# Altium PCB SV601121A.PcbDoc (part 2 of 2)
Units mil, origin at the board's own origin, x right, y up, seen from the top; angles counter-clockwise.
Board outline 1980 x 1700 mil, 6 copper layers (Top Layer, MidLayer1, MidLayer2, Mid-Layer 3, Mid-Layer 4, Bottom Layer), stack 61.3 mil thick; 85 components, 35 nets, 187 pads, 175 vias.
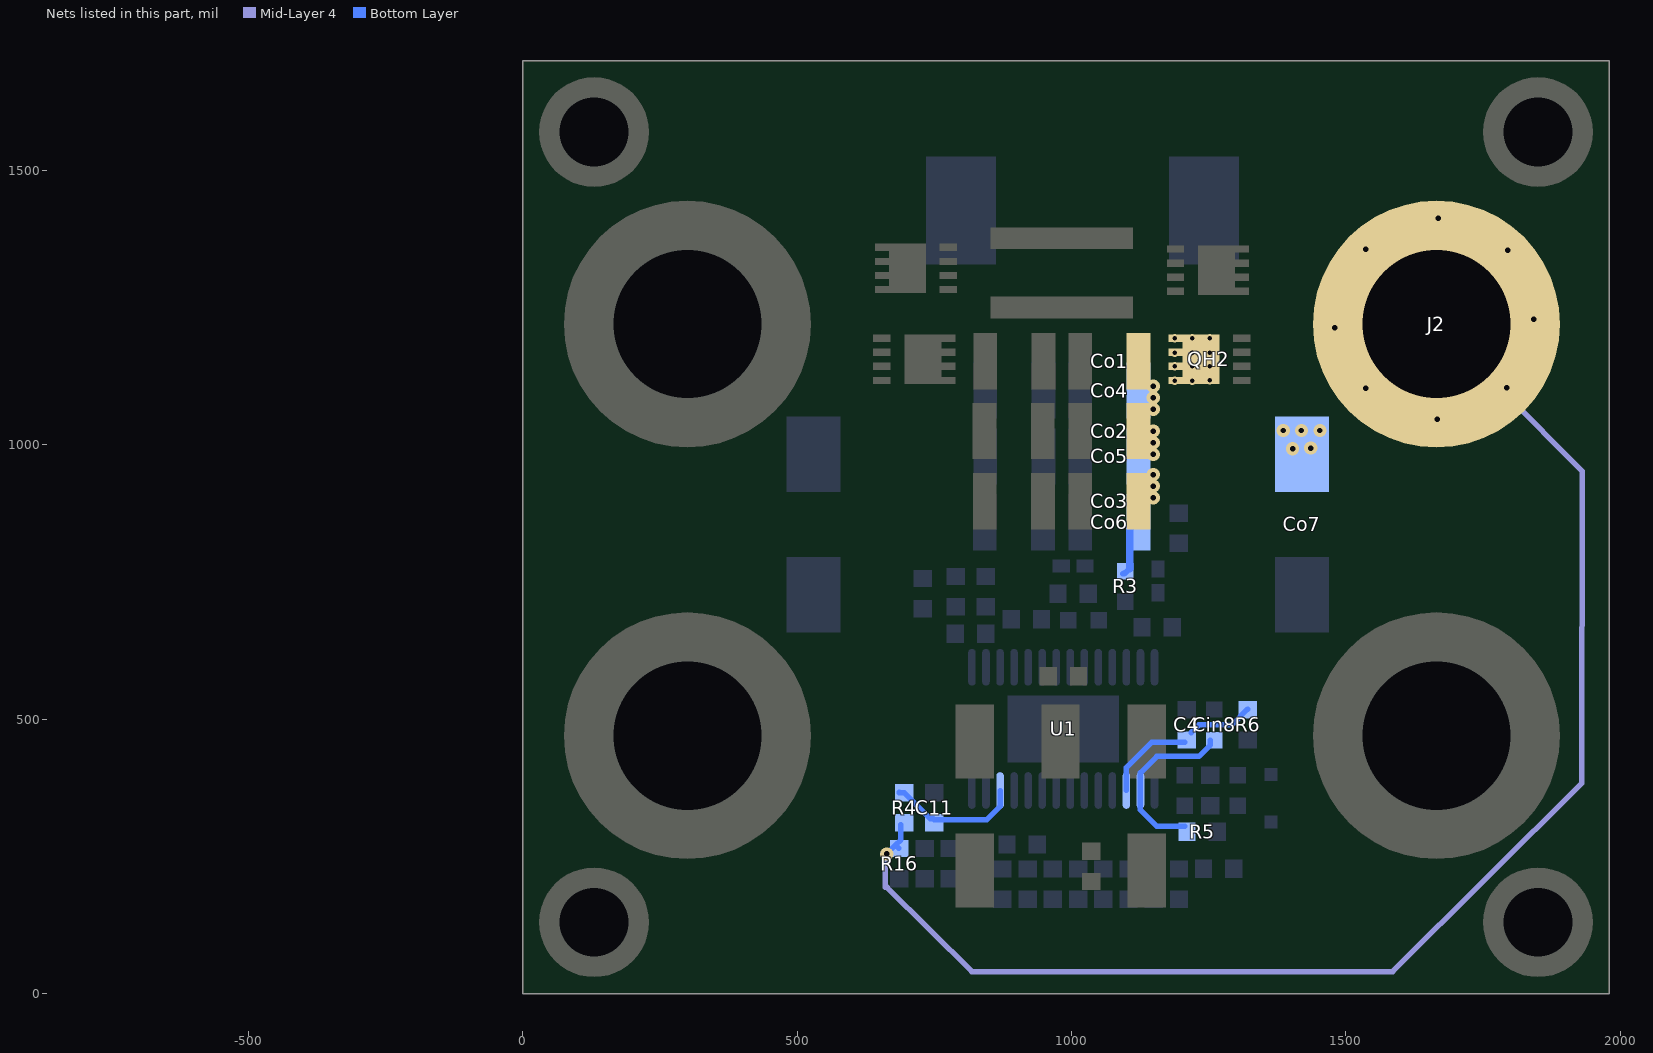
[diagram p6: the nets of this part, all layers, seen from the top]

## Via types
v1: diameter 24, hole 10, Top Layer to Bottom Layer, tented both sides, 77 vias
v2: diameter 15.75, hole 7.87, Top Layer to Bottom Layer, tented both sides, 54 vias
v3: diameter 30, hole 15, Top Layer to Bottom Layer, tented both sides, 17 vias
v4: diameter 15.75, hole 7.87, Top Layer to Bottom Layer, 15 vias
v5: diameter 24, hole 12, Top Layer to Bottom Layer, tented both sides, 8 vias
v6: diameter 20, hole 10, Top Layer to Bottom Layer, tented both sides, 2 vias
v7: diameter 29, hole 15, Top Layer to Bottom Layer, tented both sides, 2 vias

## Nets (pads, with @x,y where several pads share a name; then routed paths per layer and width w, separated by ;. In a path a pad name is that pad's centre, name@x,y a point inside that pad or via, vN(x,y) a via of type N, cw(c..) or ccw(c..) an arc to the next point about the centre after c; other vN are vias at no path point) (continued)
VIN_IC: Cin8.1 R5.1 U1.2 | length 317.9
  Bottom Layer w10: R5.1@1206.6,304.75 1155.71,304.75 1125.7,334.76 U1.2@1125.7,370.16 1125.7,402.46 1155.53,432.28 1232.04,432.28 1253.16,453.4 Cin8.1@1253.16,461.75
VISNS: C4.2 R6.2 U1.3 | length 287.3
  Bottom Layer w10: U1.3@1100.11,370.16 1100.11,411.7 1146.6,458.19 C4.2@1206.16,458.19 ; C4.2@1218.16,475.75 1232.16,489.75 1292.44,489.75 R6.2@1321,518.31
VOUT: Co1.1 Co2.1 Co3.1 Co4.1 Co5.1 Co6.1 Co7.1 J2.1 QH2.5 QH2.6 QH2.7 QH2.8 QH2.9 R3.2 R4.2 R16.1 | length 2557.5
  Mid-Layer 4 w10: 661,193.74 v1@661,254.75 ; 664.08,193.74 818.45,40 1585.31,40 1930,383.69 ; J2.1@1793.16,1100.97 v1(1793.16,1104) 1793.16,1124.19 1791.46,1125.9 1791.46,1100.5 1786.85,1095.9 1930.89,951.86 1930,386.43
  Bottom Layer w10: v1@657.22,254.75 v1(663.4,254.75) R16.1@679.4,270.75 ; R16.1@685.4,264.75 R16.1@679.4,270.75 ; R4.2@688.96,307.75 688.96,280.31 R16.1@679.4,270.75 ; R3.2@1092.96,764.75 1095.59,766.3 1099,768.3 R3.2@1100.24,769.03 ; R3.2@1096.51,764.75 R3.2@1106,774.24 ; Co6.1@1106,849.64 Co6.1@1122.11,865.75
  Bottom Layer w14: R3.2@1106,774.24 Co6.1@1106,849.64
  other v1: 1149,903.75 1149,924.75 1149,945.75 1149,982.62 1403,993 1436,994 1149,1003.88 1149,1025.14 1386,1026.16 1419,1026.16 1452.68,1026.16 1666.16,1046.9 1149,1064.75 1149,1085.75 1536,1103 1149,1106.75 1480,1213.74 1842.16,1228.9 1795,1355 1536,1356 1668.16,1412.9
  other v2: 1188.16,1117 1220,1117 1252,1118 1188,1143 1220,1143 1252,1143 1188,1168 1220,1168 1252,1168 1188,1194 1220,1194 1252,1194
VOUTSNS: C11.1 R4.1 U1.12 | length 243.6
  Bottom Layer w10: R4.1@686,366.6 686.15,366.45 694.85,366.45 R4.1@695,366.31 742.31,319 748,319 750.25,316.75 845.47,316.75 852.42,323.7 ; 852.45,323.7 864.1,335.35 ; 864.1,335.38 869.8,341.08 U1.12@869.8,370.16
pads on no net: H3. H4. H7. H8. LBL1.0

## Polygon pours and split planes (outlines as drawn)
SW2 on Bottom Layer "Bottom Layer-No Net 1" (solid, remove dead copper, pour order 133): 1294.99,1109 1369.55,1109 1376.94,1116.64 1377,1320.26 1351,1346 1326,1371 1325.83,1519.99 1324.28,1523.73 1298.01,1549.98 1078.03,1550.03 1048.93,1520.94 1048.93,1243.96 1066.66,1226 1280.96,1226.05 1288.25,1218.74 1288.02,1115.99
SW1 on Bottom Layer "Bottom Layer-No Net" (solid, remove dead copper, pour order 132): 631.4,1139.6 636.21,1134.79 679.79,1134.79 684.06,1139.06 684.06,1215.22 694.84,1226 940.04,1226 957,1242.96 957,1523 930,1550 741,1550 714,1523 714,1381 713.29,1380.71 650.1,1380.97 632.69,1363.66
VOUT on Bottom Layer "Bot Layer-VOUT" (solid, remove dead copper, pour order 134): 1098,1221.29 1238.86,1221.29 1267.63,1191.99 1267.63,1105.09 1340.03,1105.09 1340.98,1690.13 1964,1688.1 1964,850.76 1271.27,853.21 1222.99,853.4 1222.88,895.92 1164.46,895.92 1152.56,882.78 1152.56,807 1098,807 1098.16,854.42
VIN on Bottom Layer "Bot Layer-VIN" (solid, remove dead copper, pour order 135): 869.8,1211.23 707.81,1211.79 707.81,1688.01 13.64,1687.97 11.93,855.39 730.43,855.39 868.97,855.27
GND on Bottom Layer "Bot Layer-GND2" (solid, remove dead copper, pour order 136): 7.2,1213.2 1961.89,1212.97 1969,1295.34 1969,10 9,10
SW2 on Bottom Layer "Bottom Layer-SW2" (solid, pour order 131): 1325.65,1268 1325.65,1526 1179,1526 1179.37,1268
SW1 on Top Layer "Top Layer-SW1" (solid, remove dead copper, pour order 103): 621.89,1135.21 622.14,1371.07 738.27,1371.07 735.85,1368.64 735.85,1267.68 674.07,1205.9 672.78,1205.01 672.78,1135.75
GND on Top Layer "Top Layer-GND" (solid, remove dead copper, pour order 106): 884.02,1266 1077,1266 1076.7,765.16 908.64,765.16 883.63,769.22
SW2 on Top Layer "Top Layer-SW2" (solid, remove dead copper, pour order 104): 1228.28,1398 1337.35,1398 1374.71,1360.46 1374.52,1111 1293,1111 1293,1244 1228,1244
VOUT on Top Layer "Top Layer-VOUT" (solid, remove dead copper, pour order 107): 1098.99,1218.65 1279,1219 1279,1100 1384.49,1099.65 1383.03,1409.78 997.88,1409.78 997.85,1689 1965.66,1688.74 1971.03,843.97 1099,844.03
GND on Top Layer "Top Layer-GND2" (solid, remove dead copper, pour order 109): 10,830 1970,830 1970,10 10,10
NetQl1_1 on Top Layer "Top Layer-Q1-1" (solid, pour order 105): 759.96,1342.61 800,1343 800,1398 1205.83,1398 1205.39,1276.51 759.96,1276.51
VIN on Top Layer "Top Layer-VIN" (solid, remove dead copper, pour order 108): 865.14,1216.99 683,1217.01 683,1108 627,1108 627,1265 972,1265 972,1689 14,1689.97 14,844.78 865,844.03
VOUT on MidLayer2 "MidLayer1-No Net 1" (solid, remove dead copper, pour order 116): 1178,1205.38 1264,1205.38 1263.97,1205.35 1263.97,1104.38 1178,1104.38
VIN on MidLayer2 "MidLayer1-No Net 1" (solid, remove dead copper, pour order 115): 700,1206 786,1206 785.97,1205.97 785.97,1105 700,1105
SW1 on MidLayer2 "MidLayer1-No Net 1" (solid, remove dead copper, pour order 117): 643,1371 729,1371 728.97,1370.97 728.97,1270 643,1270
SW2 on MidLayer2 "MidLayer1-No Net 1" (solid, remove dead copper, pour order 118): 1236,1368.58 1322,1368.58 1321.97,1368.55 1321.97,1267.58 1236,1267.58
GND on MidLayer2 "MidLayer2-GND" (solid, pour order 119): 14.55,1690.59 15.54,1689.62 1960.63,1689.62 1963.55,1686.76 1965,9 1912.53,11.14 -14,11.14 12.48,37.08 12.48,1687.64
VOUT on MidLayer2 "MidLayer2-VOUT" (solid, remove dead copper, shelved, pour order 120): 4056.05,-23494.45 2827.92,-23494.45 2827.92,-20744.45 4056.05,-20744.45
SW2 on MidLayer1 "MidLayer1-No Net 1" (solid, remove dead copper, pour order 111): 1236,1369 1322,1369 1321.97,1368.97 1321.97,1268 1236,1268
SW1 on MidLayer1 "MidLayer1-No Net" (solid, remove dead copper, pour order 110): 644,1372 728,1372 728,1270 644,1270
GND on MidLayer1 "Mid Layer1-GND2" (solid, remove dead copper, pour order 114): 14.16,1665.13 1963.85,1673.87 1962.85,10.79 15.16,5.78
VIN on MidLayer1 "MId-Layer-1-VIN" (solid, remove dead copper, pour order 112): 829,1689 13.3,1689 12.87,864 828,864
VOUT on MidLayer1 "Mid-Layer1-VOUT" (solid, remove dead copper, pour order 113): 1131.25,859.29 1131.25,1671.01 1961,1672.99 1962,859
VOUT on Mid-Layer 4 "MidLayer1-No Net 1" (solid, remove dead copper, pour order 127): 1175.32,1206 1261.32,1206 1261.29,1205.97 1261.29,1105 1175.32,1105
SW2 on Mid-Layer 4 "MidLayer1-No Net 1" (solid, remove dead copper, pour order 128): 1236,1369 1322,1369 1321.97,1368.97 1321.97,1268 1236,1268
SW1 on Mid-Layer 4 "MidLayer1-No Net 1" (solid, remove dead copper, pour order 129): 642,1372 728,1372 727.97,1371.97 727.97,1271 642,1271
VIN on Mid-Layer 4 "MidLayer1-No Net 1" (solid, remove dead copper, pour order 126): 700,1205 786,1205 785.97,1204.97 785.97,1104 700,1104
GND on Mid-Layer 4 "Mid-Layer 4-GND" (solid, pour order 130): 17.57,1688.52 21.22,1692 1974,1692 1967.53,1685.83 1967.53,8.08 1963.24,4 17.57,4
VIN on Mid-Layer 3 "MidLayer1-No Net 1" (solid, remove dead copper, pour order 123): 701,1205 787,1205 786.97,1204.97 786.97,1104 701,1104
VOUT on Mid-Layer 3 "MidLayer1-No Net 1" (solid, remove dead copper, pour order 122): 1177,1206 1263,1206 1262.97,1205.97 1262.97,1105 1177,1105
SW2 on Mid-Layer 3 "MidLayer1-No Net 1" (solid, remove dead copper, pour order 121): 1235,1370 1321,1370 1320.97,1369.97 1320.97,1269 1235,1269
SW1 on Mid-Layer 3 "MidLayer1-No Net 1" (solid, remove dead copper, pour order 124): 643,1371 729,1371 728.97,1370.97 728.97,1270 643,1270
GND on Mid-Layer 3 "Mid-Layer 3-GND" (solid, pour order 125): 24.19,1667.41 27.51,1670.55 1963.27,1670.55 1969.19,1664.97 1969.19,10.09 1968.77,9.7 24.19,9.7

## Keep-outs
Keep-Out Layer:
  lines w10: -5,-5 1985,-5 1985,1705 -5,1705 -5,-5

## Other copper
Top Layer:
  pour cut-out: 985.61,1312.97 cw(c985.61,1331.32) 967.26,1331.32 cw(c985.61,1331.32) 985.61,1349.68 cw(c985.61,1331.32) 1003.97,1331.32 cw(c985.61,1331.32)
  pour cut-out: 985.61,1276.16 cw(c985.61,1294.51) 967.26,1294.51 cw(c985.61,1294.51) 985.61,1312.86 cw(c985.61,1294.51) 1003.97,1294.51 cw(c985.61,1294.51)
  pour cut-out: 919.86,711.86 918,702.49 912.69,694.55 904.75,689.25 895.39,687.39 886.03,689.25 878.09,694.55 872.78,702.49 870.92,711.86 872.78,721.22 878.09,729.16 886.03,734.47 895.39,736.33 904.75,734.47 912.69,729.16 918,721.22
  pour cut-out: 825.44,782.37 823.58,773 818.27,765.06 810.33,759.76 800.97,757.9 791.6,759.76 783.67,765.06 778.36,773 776.5,782.37 778.36,791.73 783.67,799.67 791.6,804.98 800.97,806.84 810.33,804.98 818.27,799.67 823.58,791.73
  text ".Layer_Name" at 129,-1122.49 h60
MidLayer1:
  pour cut-out: 985.48,1277.59 cw(c985.48,1295.94) 967.13,1295.94 cw(c985.48,1295.94) 985.48,1314.3 cw(c985.48,1295.94) 1003.84,1295.94 cw(c985.48,1295.94)
  pour cut-out: 826.32,781.54 824.45,772.17 819.15,764.24 811.21,758.93 801.85,757.07 792.48,758.93 784.54,764.24 779.24,772.17 777.38,781.54 779.24,790.9 784.54,798.84 792.48,804.15 801.85,806.01 811.21,804.15 819.15,798.84 824.45,790.9
  text ".layer_Name" at 129,-1124 h60
MidLayer2:
  pour cut-out: 985.61,1276.16 cw(c985.61,1294.51) 967.26,1294.51 cw(c985.61,1294.51) 985.61,1312.86 cw(c985.61,1294.51) 1003.97,1294.51 cw(c985.61,1294.51)
  pour cut-out: 825.44,782.37 823.58,773 818.27,765.06 810.33,759.76 800.97,757.9 791.6,759.76 783.67,765.06 778.36,773 776.5,782.37 778.36,791.73 783.67,799.67 791.6,804.98 800.97,806.84 810.33,804.98 818.27,799.67 823.58,791.73
  text ".layer_Name" at 129,-1122 h60
Mid-Layer 3:
  pour cut-out: 985.61,1276.16 cw(c985.61,1294.51) 967.26,1294.51 cw(c985.61,1294.51) 985.61,1312.86 cw(c985.61,1294.51) 1003.97,1294.51 cw(c985.61,1294.51)
  pour cut-out: 825.44,782.37 823.58,773 818.27,765.06 810.33,759.76 800.97,757.9 791.6,759.76 783.67,765.06 778.36,773 776.5,782.37 778.36,791.73 783.67,799.67 791.6,804.98 800.97,806.84 810.33,804.98 818.27,799.67 823.58,791.73
  text ".layer_Name" at 127,-1124 h60
Mid-Layer 4:
  pour cut-out: 985.61,1276.16 cw(c985.61,1294.51) 967.26,1294.51 cw(c985.61,1294.51) 985.61,1312.86 cw(c985.61,1294.51) 1003.97,1294.51 cw(c985.61,1294.51)
  pour cut-out: -788.42,451.51 cw(c-788.42,469.86) -806.77,469.86 cw(c-788.42,469.86) -788.42,488.22 cw(c-788.42,469.86) -770.07,469.86 cw(c-788.42,469.86)
  pour cut-out: 825.14,781.61 823.27,772.24 817.97,764.3 810.03,759 800.67,757.14 791.3,759 783.36,764.3 778.06,772.24 776.2,781.61 778.06,790.97 783.36,798.91 791.3,804.22 800.67,806.08 810.03,804.22 817.97,798.91 823.27,790.97
  text ".layer_Name" at 127,-1118 h60
Bottom Layer:
  rectangle net VOUT: 1131.67,815.36 1152,887.75
  pour cut-out: 985,1278.07 cw(c985,1296.42) 966.65,1296.42 cw(c985,1296.42) 985,1314.77 cw(c985,1296.42) 1003.35,1296.42 cw(c985,1296.42)
  pour cut-out: 819,799.75 818.62,799.37 818.62,734.47 739,734.47 739,805 819,805
  pour cut-out: 880.61,541.77 1120.5,541.77 1117.31,544.97 1117.31,554.75 1113.26,558.79 890.03,558.79
  pour cut-out: 771,172 771,14.81 784,14.81 784,172
  pour cut-out: 1383.95,389.24 1430,389.24 1430,8.56 1418,8.56 1418,379.17 1384.02,379.17
  text ".Layer_Name" at 129,-1122.49 h60

## Silkscreen, mask and mechanical layers (free items; w line width, h text height)
Top Overlay:
  region: 1113,1581.58 1113,1503 1309.52,1503 1309.52,1581.58
  text "2014" at 898,1609 h50
  text "TI" at 1174,1609 h50
  text "©" at 781,1605.48 h105
  text ".PRJ_Number" at 694,1520 h40
  text ".PCB_Rev" at 1005.39,1519 h40
  text "-" at 1062,1516 h40
  text "VOUT" at 1470,1502 h50
  text "VIN" at 318,1492 h50
  text "GND" at 302,136 h60
  text "GND" at 1541,130 h60
  text ".Layer_Name" at 129,-1122.49 h60
Bottom Overlay:
  text "MADE IN USA" at 697,1612 h40
  text "UL94V-0" at 630,1537 h40
  text ".Layer_Name" at 129,-1122.49 h60
Top Paste:
  text ".Layer_Name" at 129,-1122.49 h60
Bottom Paste:
  text ".Layer_Name" at 129,-1122.49 h60
Top Solder:
  text ".Layer_Name" at 129,-1122.49 h60
  text ".Layer_Name" at 129,-1122.49 h60
Bottom Solder:
  text ".Layer_Name" at 129,-1122.49 h60
Drill Guide:
  text ".Layer_Name" at 129,-1122.49 h60
M1 Board Outline:
  the board outline again, w10
  text ".Layer_Name" at 129,-1122.49 h60
M2 Board Dimensions:
  rectangle: -596.5,-493.5 -471.5,-368.5
  rectangle: -471.5,-618.5 -96.5,-493.5
  lines w7: -596.5,-493.5 403.5,-493.5 ; -471.5,-618.5 -471.5,-368.5 ; -346.5,-618.5 -346.5,-368.5 ; -96.5,-618.5 -96.5,-368.5 ; 153.5,-618.5 153.5,-368.5 ; -596.5,-618.5 -596.5,-556 -596.5,-431 -596.5,-368.5 403.5,-368.5 403.5,-618.5 -596.5,-618.5
  lines w10: -596.5,-683.5 -596.5,-663.5 ; -536.5,-693.5 -596.5,-673.5 ; -536.5,-653.5 -596.5,-673.5 ; -372.42,-673.5 -596.5,-673.5 ; 179.42,-673.5 403.5,-673.5 ; 343.5,-693.5 403.5,-673.5 ; 343.5,-653.5 403.5,-673.5 ; 403.5,-683.5 403.5,-663.5
  text "1000 (mil)" at -362.42,-709.49 h60
  text ".Layer_Name" at 129,-1122.49 h60
M3 3D STEP Top:
  text ".Layer_Name" at 129,-1122.49 h60
M4 3D STEP Bottom:
  text ".Layer_Name" at 129,-1122.49 h60
M5 Assembly Top:
  lines w10: -740,-1194.17 5860,-1194.17 ; -740,-990.83 5862,-990.83 ; -740,-787.5 -740,-1397.5 3265,-1397.5 5862,-1397.5 5862,-787.5 -739.5,-787.5 -739.5,-1397.5 836,-1397.5 ; 1725,-1397.5 1725,-787.5 ; 2992,-990.83 2992,-787.5 ; 3832,-990.83 3832,-787.5 ; 4454,-1404 4454,-1201.17
  text "COMPONENTS MARKED 'DNP' SHOULD NOT BE POPULATED." at 705.5,-582.5 h60
  text "ASSEMBLY VARIANT:" at 705,-698 h60
  text ".VariantName" at 1741,-698 h60
  text "PCB VIEWED FROM TOP SIDE" at -676.5,-919.67 h60
  text "BOARD #:" at 1800,-919.67 h60
  text ".PRJ_Number" at 2345.5,-919.67 h60
  text "REV:" at 3190,-919.67 h60
  text ".PCB_Rev" at 3481.5,-919.67 h60
  text "SVN REV:" at 4028,-919.67 h60
  text ".VersionControl_RevNumber" at 4534,-919.67 h60
  text "IGNORE ->" at -676.5,-1122.49 h60
  text "PLOT NAME =" at -676.5,-1328.34 h60
  text ".plot_File_Name" at 129,-1328.34 h60
  text "GENERATED    :" at 1802,-1328.34 h60
  text ".Print_Date" at 2671.5,-1328.34 h60
  text ".Print_Time" at 3400.5,-1328.34 h60
  text "TEXAS INSTRUMENTS" at 4665,-1328.34 h60
M6 Assembly Bottom:
  lines w10: -740.5,-991.33 5861.5,-991.33 ; -738.5,-1194.67 5861.5,-1194.67 ; 667.5,-1404.5 667.5,-1201.67 ; 1289.5,-991.33 1289.5,-788 ; 2129.5,-991.33 2129.5,-788 ; 3396.5,-1398 3396.5,-788 ; 4285.5,-1398 5861,-1398 5861,-788 -740.5,-788 -740.5,-1398 1856.5,-1398 5861.5,-1398 5861.5,-788
  text "SVN REV:" at 1089,-451 h60
  text "COMPONENTS MARKED 'DNP' SHOULD NOT BE POPULATED." at 5654,-582 h60
  text ".VariantName" at 4610,-698 h60
  text "ASSEMBLY VARIANT:" at 5649,-698 h60
  text ".VersionControl_RevNumber" at 587.5,-920.17 h60
  text ".PCB_Rev" at 1640,-920.17 h60
  text "REV:" at 1931.5,-920.17 h60
  text ".PRJ_Number" at 2776,-920.17 h60
  text "BOARD #:" at 3321.5,-920.17 h60
  text "PCB VIEWED FROM BOTTOM SIDE" at 5798,-920.17 h60
  text "IGNORE ->" at 2099.85,-1122.49 h60
  text "TEXAS INSTRUMENTS" at 456.5,-1328.84 h60
  text ".Print_Time" at 1721,-1328.84 h60
  text ".Print_Date" at 2450,-1328.84 h60
  text "GENERATED    :" at 3319.5,-1328.84 h60
  text ".plot_File_Name" at 4992.5,-1328.84 h60
  text "PLOT NAME =" at 5798,-1328.84 h60
M9 Title Sheet:
  drawing of 57 lines, arcs and shapes, not listed
  text "1" at 291.84,7772.5 h70
  text "2" at 2787.5,7772.5 h70
  text "3" at 5276.84,7772.5 h70
  text "4" at 7783.51,7772.5 h70
  text "5" at 10282.5,7772.5 h70
  text "6" at 12787.5,7772.5 h70
  text "A" at -864.5,6629.5 h70
  text "A" at 13935.5,6629.5 h70
  text "B" at -864.5,4249.5 h70
  text "B" at 13935.5,4249.5 h70
  text "C" at -864.5,1874.5 h70
  text "C" at 13935.5,1874.5 h70
  text "PROJECT TITLE:" at 10895.5,13.5 h45
  text ".PRJ_Number" at 10945.5,-119.83 h70
  text "DESIGNED FOR:" at 10895.5,-287.5 h45
  text ".PRJ_Customer" at 10945.5,-427.5 h70
  text "D" at -864.5,-495.5 h70
  text "D" at 13935.5,-495.5 h70
  text "FILE NAME:" at 10895.5,-587.5 h45
  text ".PRJ_Title" at 10945.5,-707.5 h70
  text "Texas Instruments (TI) and/or its licensors do not warrant the accuracy or completeness of this specification" at 5926,-869.34 h45
  text "ENGINEER:" at 10895.5,-877.5 h45
  text "LAYOUT BY:" at 12400.5,-877.5 h45
  text "or any information contained therein. TI and/or its licensors do not warrant that this design will meet" at 5881.01,-982 h45
  text "Timothy  Hegarty" at 10945.5,-1032.49 h70
  text "Alan Cuperus" at 12451,-1032.49 h70
  text "the specifications, will be suitable for your application or fit for any particular purpose, or will operate in" at 5881.01,-1094.67 h45
  text ".Layer_Name" at 129,-1122.49 h60
  text "ALTIUM DESIGNER VERSION:" at 12400.5,-1187.5 h45
  text "an implementation. TI and/or its licensors do not warrant that the design is production worthy. You should" at 5881.01,-1207.33 h45
  text "completely validate and test your design implementation to confirm the system functionality for your application." at 5926,-1320 h45
  text "1:1" at 10945.5,-1320.83 h70
  text "AD 10" at 12451,-1320.83 h70
  text "1" at 291.84,-1527.5 h70
  text "2" at 2787.5,-1527.5 h70
  text "3" at 5276.84,-1527.5 h70
  text "4" at 7783.51,-1527.5 h70
  text "5" at 10282.5,-1527.5 h70
  text "6" at 12787.5,-1527.5 h70
M10 Fab Notes:
  drawing of 185 lines, arcs and shapes, not listed
  text "DESIGN INFORMATION" at 11925.02,5657.55 h60
  text "MIN. TRACK WIDTH:" at 11280.46,5477.55 h60
  text "8" at 12376.7,5477.55 h60
  text "MIL" at 12531.46,5477.55 h60
  text "MIN. CLEARANCE:" at 11280.46,5345.55 h60
  text "0.2" at 12316.7,5345.55 h60
  text "mm" at 12531.46,5345.55 h60
  text "MIN. VIA PAD SIZE:" at 11280.46,5213.55 h60
  text "24" at 12346.71,5213.55 h60
  text "MIL" at 12531.46,5213.55 h60
  text "0.05mm (2MIL)" at 11975.46,5071.84 h60
  text "MINIMUM ANNULAR RING" at 10951.23,5067.55 h60
  text "EXTERNAL" at 12683.46,5067.55 h60
  text "PER" at 11151.23,4949.55 h60
  text "IPC-D-275 CLASS 2 LEVEL C" at 11371.23,4949.55 h60
  text "+/-" at 12467,4836.55 h60
  text "MIL, HOLES" at 12859.46,4837.26 h60
  text "+/-" at 13321,4836.55 h60
  text "REGISTRATION TOLERANCES:" at 10951.23,4831.55 h60
  text "METAL" at 12151,4831.55 h60
  text "5" at 12727.2,4831.55 h60
  text "3" at 13560.2,4831.55 h60
  text "MIL" at 13676.46,4831.55 h60
  text "MATERIAL:" at 10876.46,4622.09 h60
  text "FR-4 High Tg" at 11862.9,4481.76 h60
  text "FR-408" at 11297.46,4473.19 h60
  text "X" at 11709.46,4473.19 h60
  text "OTHER" at 12785.46,4473.19 h60
  text "62 MIL (1.6mm) +/-10%" at 11617.56,4310.47 h60
  text "THICKNESS:" at 10951.23,4306.19 h60
  text "X" at 11489.4,4306.19 h60
  text "OTHER" at 12902.46,4306.19 h60
  text "TOLERANCE:" at 10951.23,4148.19 h60
  text "X" at 11790.53,4148.19 h60
  text "ANSI IPC-6012 TYPE 3 CLASS 2" at 11977.48,4148.19 h60
  text "OTHER +/-" at 11977.46,3992.19 h60
  text "BOW & TWIST:" at 10951.23,3835.19 h60
  text "X" at 11790.53,3835.19 h60
  text "ANSI IPC-6012 TYPE 3 CLASS 2" at 11977.48,3835.19 h60
  text "OTHER +/-" at 11977.46,3676.68 h60
  text "DRILLING:" at 10876.46,3538.19 h60
  text "REFERENCE:" at 10951.23,3421.19 h60
  text "X" at 11599.46,3421.19 h60
  text "AS SHOWN" at 11786.46,3421.19 h60
  text "X" at 12500.46,3421.19 h60
  text "NC_DRILL FILES" at 12637.46,3421.19 h60
  text "PTH MIN COPPER THICKNESS:" at 10951.23,3263.19 h60
  text "X" at 12301.46,3263.19 h60
  text "1MIL" at 12438.46,3263.19 h60
  text "OTHER" at 12935.46,3263.19 h60
  text "BOARD FINISH:" at 10876.46,3104.19 h60
  text "SILKSCREEN:" at 11031.68,2986.19 h60
  text "X" at 11980.46,2986.19 h60
  text "TOP" at 12106.46,2986.19 h60
  text "X" at 12490.46,2986.19 h60
  text "BOTTOM" at 12617.46,2986.19 h60
  text "SILKSCREEN COLOR:" at 11031.68,2819.19 h60
  text "X" at 11979.42,2819.19 h60
  text "WHITE" at 12106.46,2819.19 h60
  text "OTHER" at 12617.46,2819.19 h60
  text "SOLDER RESIST COLOR:" at 11031.68,2649.19 h60
  text "RED" at 13291,2541 h60
  text "X" at 12704,2498 h60
  text "GREEN" at 11726.46,2489.99 h60
  text "BLUE" at 12317.46,2489.99 h60
  text "OTHER" at 12855.46,2489.99 h60
  text "IMMERSION GOLD (ENIG)" at 11937.46,2301.47 h60
  text "ENEPIG" at 13275,2298.19 h60
  text "SURFACE FINISH:" at 10876.46,2297.19 h60
  text "X" at 11750.51,2297.19 h60
  text "IMM. TIN/SILVER OR EQUIV" at 11206,2140.19 h60
  text "OTHER" at 12637.46,2140.19 h60
  text "ARRAY/PANEL:" at 10876.46,1961.19 h60
  text "CUT AND TRIM PER MECH LAYER 1" at 11937.46,1956.9 h60
  text "X" at 12614,1807.55 h60
  text "N.C. ROUTE" at 11937.46,1805.19 h60
  text "V. SCORE" at 12803.46,1805.19 h60
  text "CERTIFICATION:" at 10876.46,1668.19 h60
  text "MATERIALS AND WORKMANSHIP FOR ALL PCBS" at 11601.46,1668.19 h60
  text "TO MEET OR EXCEED THE REQUIREMENTS OF:" at 11601.46,1570.19 h60
  text "X" at 11227.96,1433.68 h60
  text "ANSI IPC-A-600F CLASS ->" at 11366.96,1433.68 h60
  text "X" at 13006.02,1433.68 h60
  text "2" at 13124.96,1433.68 h60
  text "1" at 12809.96,1432.19 h60
  text "3" at 13478.96,1432.19 h60
  text "X" at 11230.02,1274.19 h60
  text "UL 94V-0" at 11366.96,1274.19 h60
  text "X" at 12042.02,1274.19 h60
  text "RoHS" at 12178.96,1274.19 h60
  text "OTHER" at 12823.36,1274.19 h60
  text "PER ORDER" at 13220.42,1274.19 h60
  text "ADDITIONAL REQUIREMENTS:" at 10876.46,1133.19 h60
  text "MICROSECTION:" at 10951.23,1018.19 h60
  text "YES" at 11856.96,1018.19 h60
  text "REQUIRED" at 12718.46,862.04 h60
  text "BARE BOARD ELEC. TEST:" at 10951.23,859.19 h60
  text "NONE" at 12256.96,859.19 h60
  text "X" at 12591.46,859.19 h60
  text "PER ORDER" at 13310.46,859.19 h60
  text "MANUFACTURER'S UL:" at 10951.23,702.19 h60
  text "RAIL" at 12116.96,697.9 h60
  text "METAL" at 12608.77,697.9 h60
  text "X" at 12984,697.55 h60
  text "SILK" at 13120.46,697.9 h60
  text ".Layer_Name" at 129,-1122.49 h60
M11 Gerber Information:
  lines w10: -740,-1194.17 5860,-1194.17 ; -740,-990.83 5862,-990.83 ; -740,-787.5 -740,-1397.5 3265,-1397.5 5862,-1397.5 5862,-787.5 -739.5,-787.5 -739.5,-1397.5 836,-1397.5 ; 1725,-1397.5 1725,-787.5 ; 2992,-990.83 2992,-787.5 ; 3832,-990.83 3832,-787.5 ; 4454,-1404 4454,-1201.17
  text "ALL ARTWORK VIEWED FROM TOP SIDE" at -676.5,-919.67 h60
  text "BOARD #:" at 1800,-919.67 h60
  text ".PRJ_Number" at 2345.5,-919.67 h60
  text "REV:" at 3190,-919.67 h60
  text ".PCB_Rev" at 3481.5,-919.67 h60
  text "SVN REV:" at 4028,-919.67 h60
  text ".VersionControl_RevNumber" at 4534,-919.67 h60
  text "LAYER NAME =" at -676.5,-1122.49 h60
  text "PLOT NAME =" at -676.5,-1328.34 h60
  text ".plot_File_Name" at 129,-1328.34 h60
  text "GENERATED    :" at 1802,-1328.34 h60
  text ".Print_Date" at 2671.5,-1328.34 h60
  text ".Print_Time" at 3400.5,-1328.34 h60
  text "TEXAS INSTRUMENTS" at 4665,-1328.34 h60
M12 Stackup:
  drawing of 399 lines, arcs and shapes, not listed
  text "Layer" at 9380.7,7576.5 h60
  text "Name" at 9790.61,7576.5 h60
  text "Material" at 10720.35,7576.5 h60
  text "Thickness" at 11580.12,7576.5 h60
  text "Constant" at 12229.96,7576.5 h60
  text "Board Layer Stack" at 12799.82,7576.5 h60
  text "Top Overlay" at 9790.61,7456.5 h60
  text "Top Solder" at 9790.61,7336.5 h60
  text "Solder Resist" at 10720.35,7336.5 h60
  text "0.40mil" at 11580.12,7336.5 h60
  text "3.5" at 12229.96,7336.5 h60
  text "1" at 9380.7,7216.5 h60
  text "Top Layer" at 9790.61,7216.5 h60
  text "2.80mil" at 11580.12,7216.5 h60
  text "Dielectric1" at 9790.61,7096.5 h60
  text "FR-4" at 10720.35,7096.5 h60
  text "8.90mil" at 11580.12,7096.5 h60
  text "4.8" at 12229.96,7096.5 h60
  text "2" at 9380.7,6976.5 h60
  text "MidLayer1" at 9790.61,6976.5 h60
  text "2.80mil" at 11580.12,6976.5 h60
  text "Dielectric2" at 9790.61,6856.5 h60
  text "FR-4" at 10720.35,6856.5 h60
  text "8.90mil" at 11580.12,6856.5 h60
  text "4.8" at 12229.96,6856.5 h60
  text "3" at 9380.7,6736.5 h60
  text "MidLayer2" at 9790.61,6736.5 h60
  text "2.80mil" at 11580.12,6736.5 h60
  text "Dielectric3" at 9790.61,6616.5 h60
  text "FR-4" at 10720.35,6616.5 h60
  text "8.90mil" at 11580.12,6616.5 h60
  text "4.8" at 12229.96,6616.5 h60
  text "4" at 9380.7,6496.5 h60
  text "Mid-Layer 3" at 9790.61,6496.5 h60
  text "2.80mil" at 11580.12,6496.5 h60
  text "Dielectric4" at 9790.61,6376.5 h60
  text "FR-4" at 10720.35,6376.5 h60
  text "8.90mil" at 11580.12,6376.5 h60
  text "4.8" at 12229.96,6376.5 h60
  text "5" at 9380.7,6256.5 h60
  text "Mid-Layer 4" at 9790.61,6256.5 h60
  text "2.80mil" at 11580.12,6256.5 h60
  text "Dielectric5" at 9790.61,6136.5 h60
  text "FR-4" at 10720.35,6136.5 h60
  text "8.90mil" at 11580.12,6136.5 h60
  text "4.8" at 12229.96,6136.5 h60
  text "6" at 9380.7,6016.5 h60
  text "Bottom Layer" at 9790.61,6016.5 h60
  text "2.80mil" at 11580.12,6016.5 h60
  text "Bottom Solder" at 9790.61,5896.5 h60
  text "Solder Resist" at 10720.35,5896.5 h60
  text "0.40mil" at 11580.12,5896.5 h60
  text "3.5" at 12229.96,5896.5 h60
  text "Bottom Overlay" at 9790.61,5776.5 h60
  text ".Layer_Name" at 129,-1122.49 h60
M13 Component Bodies Top:
  text ".Layer_Name" at 129,-1122.49 h60
M14 Component Bodies Bottom:
  text ".Layer_Name" at 129,-1122.49 h60
M15 Courtyards Top:
  text ".Layer_Name" at 129,-1122.49 h60
M16 Courtyards Bottom:
  text ".Layer_Name" at 129,-1122.49 h60
Drill Drawing:
  text ".legend" at 4674.5,461.5 h60
  text "Drill Table" at 4699.5,276.5 h60
  text ".Layer_Name" at 129,-1122.49 h60

## Dimensions
0,0 to 1980,0 on M2 Board Dimensions
0,0 to 0,1700 on M2 Board Dimensions

## Text inside footprints (layer, text, board x,y; h text height)
Designator10: Bottom Overlay "not FCC approved for resale." at 17.62,489.95 h60 r270; Bottom Overlay "For evaluation only;" at 71.01,602.32 h60 r270
Logo3: Bottom Overlay "Pb" at 1875.6,832.1 h60
ZZ1: M5 Assembly Top "Install label in silkscreened box after final wash.  Text shall be 8 pt font.  Text shall be per the Label Table in the PDF schematic." at 309,2664 h40